# Altium PCB WatcherJet.PcbDoc (part 3 of 3)
Units mm, origin at the board's own origin, x right, y up, seen from the top; angles counter-clockwise.
Board outline 160 x 115 mm, 2 copper layers (Top Layer, Bottom Layer); 119 components, 123 nets, 459 pads, 208 vias.
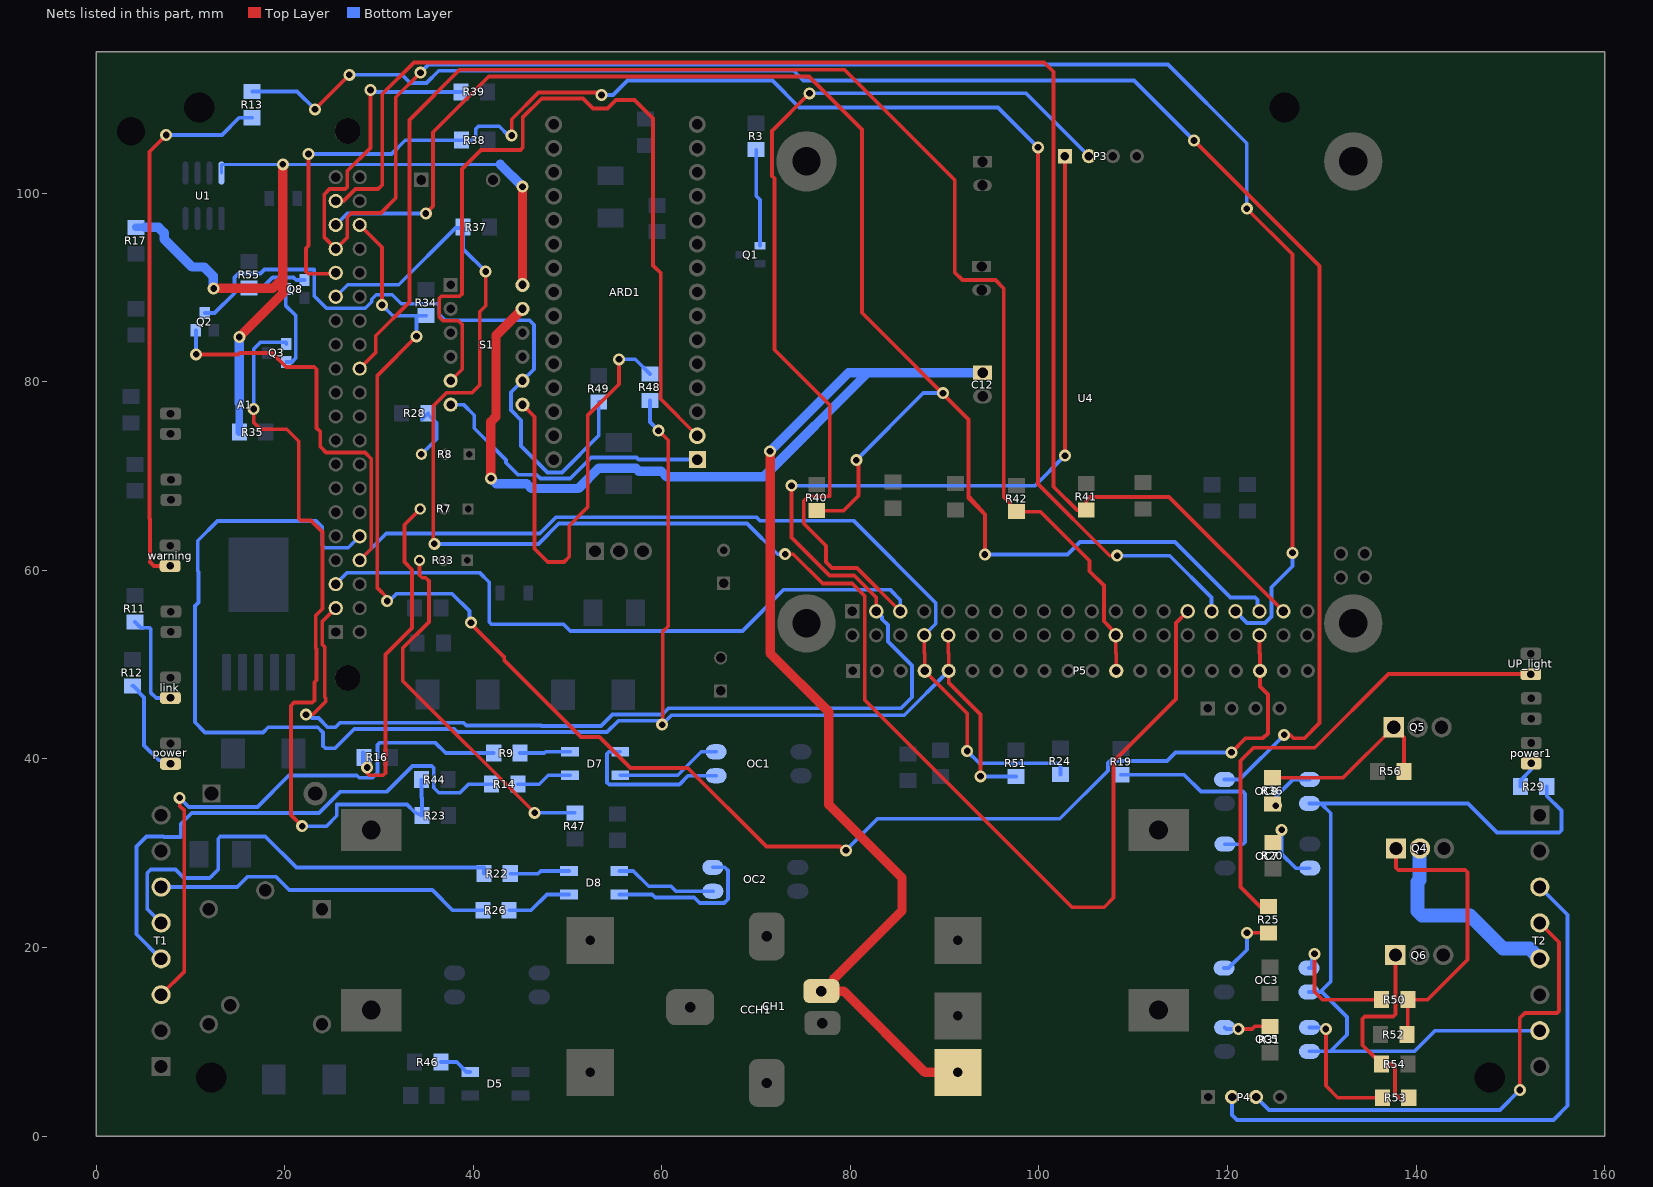
[diagram p3: the nets of this part, all layers, seen from the top]

## Via types
v1: diameter 1.27, hole 0.711, Top Layer to Bottom Layer, 200 vias
v2: diameter 1.2, hole 0.7, Top Layer to Bottom Layer, 8 vias

## Nets (pads, with @x,y where several pads share a name; then routed paths per layer and width w, separated by ;. In a path a pad name is that pad's centre, name@x,y a point inside that pad or via, vN(x,y) a via of type N, cw(c..) or ccw(c..) an arc to the next point about the centre after c; other vN are vias at no path point) (continued)
NetD5_4: D5.4 R46.1 | length 3.5
  Bottom Layer w0.4: R46.1@36.574,7.841 38.232,7.841 39.265,6.808 D5.4@39.678,6.808
NetD7_1: D7.1 OC1.1 | length 16.6
  Bottom Layer w0.4: D7.1@55.572,40.768 54.383,40.768 54.178,40.564 54.178,37.516 54.407,37.287 61.849,37.287 62.784,38.222 OC1.1@65.75,38.222
NetD7_2: D7.2 R9.1 | length 5.4
  Bottom Layer w0.4: R9.1@44.957,40.62 47.523,40.62 47.672,40.768 D7.2@50.247,40.768
NetD7_3: D7.3 OC1.2 | length 11.2
  Bottom Layer w0.4: D7.3@55.572,38.268 61.682,38.268 64.176,40.762 OC1.2@65.75,40.762
NetD7_4: D7.4 R14.1 | length 5.9
  Bottom Layer w0.4: R14.1@44.726,37.322 46.99,37.322 47.937,38.268 D7.4@50.247,38.268
NetD8_1: D8.1 OC2.1 | length 10.8
  Bottom Layer w0.4: D8.1@55.463,28.129 56.964,28.129 58.601,26.493 60.971,26.493 61.496,25.968 OC2.1@65.406,25.968
NetD8_2: D8.2 R22.1 | length 6.3
  Bottom Layer w0.4: R22.1@43.916,27.831 46.863,27.831 47.161,28.129 D8.2@50.138,28.129
NetD8_3: D8.3 OC2.2 | length 16.9
  Bottom Layer w0.4: D8.3@55.463,25.629 58.953,25.629 59.284,25.298 63.424,25.298 64.008,24.714 66.599,24.714 67.005,25.121 67.005,28.178 66.675,28.508 OC2.2@65.406,28.508
NetD8_4: D8.4 R26.1 | length 7
  Bottom Layer w0.4: R26.1@43.8,23.954 46.126,23.954 47.802,25.629 D8.4@50.138,25.629
Netlink_1: link.1 R11.1 | length 11.1
  Bottom Layer w0.4: R11.1@4.089,54.531 4.689,53.931 5.624,53.931 5.766,53.789 5.766,47.066 6.352,46.48 link.1@7.869,46.48
NetOC3_2: OC3.2 R25.1 | length 7.3
  Top Layer w0.4: v1(122.059,21.56) R25.1@124.366,21.56
  Bottom Layer w0.4: OC3.2@119.638,17.818 120.117,17.818 122.059,19.761 v1(122.059,21.56)
NetOC3_3: OC3.3 R50.2 | length 13.4
  Top Layer w0.4: v1(129.235,19.329) 129.235,15.302 130.073,14.464 R50.2@136.328,14.464
  Bottom Layer w0.4: OC3.3@128.638,17.818 128.956,17.818 128.956,19.05 v1(129.235,19.329)
NetOC5_2: OC5.2 R31.1 | length 5
  Top Layer w0.4: v1(121.144,11.363) 122.605,11.363 122.878,11.636 R31.1@124.496,11.636
  Bottom Layer w0.4: OC5.2@119.694,11.525 119.856,11.363 v1(121.144,11.363)
NetOC5_3: OC5.3 R53.2 | length 14.4
  Top Layer w0.4: v1(130.432,11.364) 130.432,5.329 131.699,4.062 R53.2@136.425,4.062
  Bottom Layer w0.4: OC5.3@128.694,11.525 130.27,11.525 v1(130.432,11.364)
NetOC7_2: OC7.2 R19.1 | length 21.3
  Bottom Layer w0.4: R19.1@108.702,38.328 115.393,38.328 117.17,36.551 121.625,36.551 121.859,36.316 121.859,31.193 121.625,30.958 OC7.2@119.732,30.958
NetOC7_4: OC7.4 R20.2 | length 7.9
  Top Layer w0.4: R20.2@124.804,31.153 125.737,32.086 v1(125.737,32.488)
  Bottom Layer w0.4: v1(125.737,32.488) 125.737,29.91 127.229,28.418 OC7.4@128.732,28.418
NetOC8_2: OC8.2 R13.2 | length 186.3
  Top Layer w0.4: v1(23.19,108.915) v1(26.848,112.573) ; v1(116.434,105.613) 129.769,92.278 129.769,43.815 128.152,42.198 126.984,42.198 126.622,42.559 v1(126.012,42.559)
  Bottom Layer w0.4: R13.2@16.538,110.816 21.289,110.816 v1(23.19,108.915) ; v1(26.848,112.573) 32.439,112.573 33.3,111.712 35.039,111.712 36.332,113.005 73.99,113.005 75.032,111.963 110.084,111.963 v1(116.434,105.613) ; OC8.2@119.685,37.825 121.277,37.825 v1(126.012,42.559)
NetOC8_3: OC8.3 R36.2 | length 5.7
  Top Layer w0.4: R36.2@124.773,35.206 124.968,35.206 v1(125.125,35.049)
  Bottom Layer w0.4: v1(125.125,35.049) 125.125,36.004 126.946,37.825 OC8.3@128.685,37.825
Netpower1_1: power1.1 R29.1 | length 2.9
  Bottom Layer w0.4: R29.1@151.063,37.072 151.063,37.719 152.212,38.868 power1.1@152.212,39.536
Netpower_1: power.1 R12.1 | length 10.5
  Bottom Layer w0.4: R12.1@3.835,47.756 3.935,47.756 4.535,47.156 4.535,47.056 5.063,46.527 5.063,41.428 6.636,39.855 7.502,39.855 power.1@7.873,39.484
NetQ1_1: Q1.1 R3.1 | length 10.4
  Bottom Layer w0.4: R3.1@70.004,104.633 70.004,99.713 70.404,99.314 Q1.1@70.404,94.443
NetQ3_1: Q3.1 R23.1 R44.2 | length 81.5
  Top Layer w0.4: v1(16.698,77.114) 16.698,75.684 17.407,74.976 20.207,74.976 21.48,73.703 21.48,65.521 21.714,65.286 22.765,65.286 23.289,64.762 23.301,64.762 23.989,64.074 23.989,55.931 23.282,55.224 23.282,51.777 23.371,51.689 23.371,48.367 23.147,48.144 23.147,46.213 22.912,45.979 20.982,45.979 20.65,45.647 20.65,34.061 v1(21.844,32.868)
  Bottom Layer w0.4: v1(16.698,77.114) 16.698,83.473 17.426,84.201 20.139,84.201 Q3.1@20.139,84.022 ; v1(21.844,32.868) 24.409,32.868 25.51,33.968 25.51,35.17 32.953,35.17 33.721,34.402 R23.1@34.561,33.995 34.561,35.865 34.507,35.918 R44.2@34.507,37.799
NetQ3_2: Q3.2 Q8.3 | length 9
  Bottom Layer w0.4: Q8.3@20.086,89.854 20.086,88.118 21.158,87.046 21.158,82.529 20.752,82.122 Q3.2@20.139,82.122
NetQ4_1: Q4.1 R50.1 R52.1 | length 30.9
  Top Layer w0.4: Q4.1@137.876,30.504 137.876,28.459 138.11,28.225 145.222,28.225 145.456,27.991 145.456,18.71 141.21,14.464 R50.1@139.128,14.464 139.128,10.858 R52.1@139.032,10.762
NetQ5_1: Q5.1 R36.1 R56.1 | length 20.2
  Top Layer w0.4: R36.1@124.773,38.006 132.263,38.006 Q5.1@137.625,43.369 138.73,42.265 R56.1@138.73,38.689
NetQ6_1: Q6.1 R53.1 R54.1 | length 21.6
  Top Layer w0.4: Q6.1@137.805,19.195 137.805,12.915 137.571,12.681 134.565,12.681 134.33,12.447 134.33,9.641 135.635,8.337 135.735,8.337 136.335,7.737 R54.1@136.335,7.637 137.389,7.637 137.77,7.256 137.77,4.494 138.201,4.062 R53.1@139.225,4.062
NetQ8_1: Q8.1 R55.1 | length 6.5
  Bottom Layer w0.4: R55.1@16.199,89.955 17.577,89.955 18.706,91.084 20.93,91.084 21.21,90.804 Q8.1@22.086,90.804
NetR7_3: R7.3 R16.2 | length 34.7
  Top Layer w0.4: v1(28.727,39.091) 28.727,38.513 28.962,38.278 30.449,38.278 30.683,38.513 30.683,51.079 33.487,53.883 33.487,60.08 32.68,60.887 32.68,64.844 R7.3@34.357,66.521
  Bottom Layer w0.4: R16.2@28.29,40.707 28.29,39.528 v1(28.727,39.091)
NetR8_3: R8.3 R28.2 | length 6.3
  Bottom Layer w0.4: R8.3@34.486,72.324 36.114,73.951 36.114,75.644 35.183,76.575 R28.2@35.183,76.675 R28.2@34.583,76.075
NetR13_1: R13.1 warning.1 | length 58.2
  Top Layer w0.4: v1(7.419,106.195) 5.645,104.421 5.645,65.513 5.702,65.456 5.702,60.892 6.112,60.482 warning.1@7.822,60.482
  Bottom Layer w0.4: v1(7.419,106.195) 13.332,106.195 15.154,108.016 R13.1@16.538,108.016
NetR25_2: R25.2 UP_light.1 | length 51.8
  Top Layer w0.4: R25.2@124.366,24.36 123.444,24.36 121.387,26.417 121.387,39.817 122.758,41.188 129.25,41.188 137.063,49.001 UP_light.1@152.178,49.001
NetR33_3: R33.3 R47.2 | length 38.6
  Top Layer w0.4: R33.3@34.285,61.066 34.285,59.516 34.586,59.215 34.951,59.215 35.294,58.872 35.294,54.544 32.515,51.765 32.515,48.282 v1(46.508,34.289)
  Bottom Layer w0.4: v1(46.508,34.289) R47.2@50.761,34.289
NG_signal_5: R22.2 T1.5 | length 47.9
  Bottom Layer w0.4: T1.5@6.873,22.606 5.406,24.073 5.406,27.889 5.786,28.268 8.402,28.268 9.303,27.368 12.04,27.368 12.275,27.602 12.275,27.619 12.937,28.281 12.937,31.539 13.171,31.773 17.925,31.773 21.225,28.473 41.116,28.473 R22.2@41.116,27.831
NG_signal_6: R26.2 T1.6 | length 36.1
  Bottom Layer w0.4: T1.6@6.873,26.416 14.951,26.416 16.044,27.508 19.065,27.508 20.474,26.099 35.649,26.099 37.793,23.954 R26.2@41,23.954
OK_signal_3: R9.2 T1.3 | length 61
  Top Layer w0.4: T1.3@6.873,14.986 9.341,17.454 9.341,34.525 8.851,35.015 v1(8.851,35.883)
  Bottom Layer w0.4: v1(8.851,35.883) 9.814,34.919 17.088,34.919 20.422,38.252 27.638,38.252 27.889,38.002 29.289,38.002 29.82,38.532 29.82,41.475 30.054,41.709 35.99,41.709 37.078,40.62 R9.2@42.157,40.62
OK_signal_4: R14.2 T1.4 | length 57.8
  Bottom Layer w0.4: T1.4@6.873,18.796 4.259,21.41 4.259,30.713 5.324,31.778 7.11,31.778 7.179,31.709 8.966,31.709 8.966,33.101 10.129,34.265 23.637,34.265 25.907,36.535 30.834,36.535 33.542,39.243 35.585,39.243 35.789,39.04 35.789,36.957 36.322,36.424 38.583,36.424 39.481,37.322 R14.2@41.926,37.322
PPS: OC3.4 OC5.4 OC8.4 R29.2 T2.7 | length 89.1
  Bottom Layer w0.4: OC3.4@128.638,15.278 130.019,15.278 132.665,12.632 132.665,10.749 130.902,8.985 ; OC8.4@128.685,35.285 129.917,35.285 ; OC5.4@128.694,8.985 130.902,8.985 ; 129.832,15.278 130.95,16.396 130.95,34.252 129.917,35.285 ; T2.7@153.126,11.179 141.995,11.179 139.802,8.985 130.902,8.985 ; R29.2@153.863,37.072 153.863,36.078 155.415,34.526 155.415,32.438 155.181,32.203 148.594,32.203 145.513,35.285 129.917,35.285
RASp_A0: A1.29 R37.1 U4.29 | length 185.4
  Top Layer w0.4: v1(35.859,62.818) 35.748,62.928 35.748,77.445 37.145,78.842 39.853,78.842 40.668,79.657 40.668,87.44 41.303,88.075 v1(41.303,91.717) ; v1(73.079,61.726) 73.932,61.726 77.058,58.6 80.201,58.6 81.509,57.292 81.509,46.253 103.49,24.272 106.918,24.272 107.917,25.271 107.917,39.743 114.539,46.365 114.539,54.432 U4.29@115.768,55.662
  Bottom Layer w0.4: A1.29@25.4,89.027 26.67,90.297 32.08,90.297 38.1,96.317 R37.1@38.913,96.317 ; v1(35.859,62.818) 46.895,62.818 49.059,64.981 69.023,64.981 72.279,61.726 v1(73.079,61.726) ; R37.1@38.913,96.415 R37.1@38.913,96.317 ; v1(41.303,91.717) 38.913,94.107 R37.1@38.913,96.317
RASp_A1: A1.31 R38.1 U4.31 | length 162.5
  Top Layer w0.4: v1(22.518,104.184) 22.518,94.449 22.247,94.178 22.247,91.715 22.481,91.481 25.314,91.481 A1.31@25.4,91.567 ; v1(44.064,106.137) 44.064,107.866 46.91,110.712 53.33,110.712 v1(53.602,110.441) ; v1(99.898,104.877) 99.898,69.177 107.513,61.562 v1(108.294,61.562)
  Bottom Layer w0.4: v1(22.518,104.184) 31.312,104.184 32.768,105.64 R38.1@38.722,105.64 39.853,105.64 40.259,106.047 40.259,106.832 40.542,107.115 42.745,107.115 43.723,106.137 v1(44.064,106.137) ; v1(53.602,110.441) 54.815,110.441 56.338,111.964 71.732,111.964 74.574,109.122 95.653,109.122 v1(99.898,104.877) ; v1(108.294,61.562) 113.874,61.562 118.308,57.128 U4.31@118.308,55.662
RASp_A2: A1.33 R39.1 U4.33 | length 203.5
  Top Layer w0.4: v1(29.083,110.973) 29.083,104.826 26.619,102.362 26.619,100.686 26.391,100.457 24.751,100.457 24.192,99.898 24.192,95.315 A1.33@25.4,94.107 26.619,95.326 26.619,97.46 27.076,97.917 30.201,97.917 31.775,99.492 31.775,110.185 v1(34.392,112.801) ; v1(122.047,98.374) 126.888,93.533 v1(126.888,61.861)
  Bottom Layer w0.4: v1(29.083,110.973) 29.3,110.755 R39.1@38.696,110.755 ; v1(34.392,112.801) 35.255,113.665 113.69,113.665 122.047,105.308 v1(122.047,98.374) ; U4.33@120.848,55.662 122.078,54.432 123.977,54.432 124.663,55.118 124.663,58.217 126.888,60.442 v1(126.888,61.861)
RASp_A3: A1.35 R40.1 U4.35 | length 176.8
  Top Layer w0.4: v1(34.95,97.866) 35.712,98.628 35.712,106.477 41.631,112.395 75.616,112.395 81.229,106.782 81.229,87.325 92.532,76.022 92.532,67.92 ; R40.1@76.427,66.336 79.265,66.336 80.848,67.92 80.848,71.478 v1(80.625,71.701) ; v1(94.259,61.697) 94.259,65.938 ; 92.532,67.92 92.532,67.666 94.259,65.938 ; 92.532,67.92 94.259,65.938
  Bottom Layer w0.4: A1.35@25.4,96.647 26.619,97.866 v1(34.95,97.866) ; v1(80.625,71.701) 87.731,78.808 v1(89.819,78.808) ; v1(94.259,61.697) 103.031,61.697 104.336,63.002 114.416,63.002 120.3,57.118 122.939,57.118 123.173,56.883 123.173,55.877 U4.35@123.388,55.662
RASp_A4: A1.37 R41.1 U4.37 | length 163.9
  Top Layer w0.4: A1.37@25.4,99.187 26.232,99.187 27.502,100.457 29.896,100.457 30.328,100.889 30.328,110.533 33.688,113.894 100.559,113.894 101.549,112.903 101.549,68.885 104.028,66.406 R41.1@105.012,66.406 105.012,67.386 105.418,67.793 113.798,67.793 U4.37@125.928,55.662
RASp_A5: A1.36 P5.18 R34.1 U4.36 | length 169.3
  Top Layer w0.4: A1.36@27.94,96.647 30.302,94.285 v1(30.302,88.163) ; v1(30.861,56.754) 30.861,57.099 29.813,58.147 29.813,80.689 v1(33.96,84.836) ; v1(39.745,54.459) 39.745,54.334 43.265,50.814 43.265,50.497 51.418,42.345 53.365,42.345 56.67,39.04 62.746,39.04 71.081,30.705 78.896,30.705 79.286,30.315 v1(79.522,30.315) ; v1(120.418,40.7) 121.927,42.209 123.776,42.209 124.283,42.716 124.283,46.847 123.446,47.684 123.446,49.337 P5.18@123.436,49.346 123.436,51.206 123.388,51.254 U4.36@123.388,53.122
  Bottom Layer w0.4: v1(30.302,88.163) 31.444,87.022 33.96,87.022 ; v1(30.861,56.754) 31.077,56.754 31.842,57.519 37.744,57.519 39.579,55.684 39.579,54.625 v1(39.745,54.459) ; v1(33.96,84.836) 33.96,87.022 ; R34.1@34.999,87.022 33.96,87.022 ; v1(79.522,30.315) 82.861,33.655 102.21,33.655 107.315,38.76 107.315,39.567 107.523,39.774 113.566,39.774 114.491,40.7 v1(120.418,40.7)
RASp_D11: A1.24 P5.12 R42.1 U4.24 | length 156.2
  Top Layer w0.4: A1.24@27.94,81.407 29.641,83.108 29.641,84.897 33.223,88.479 33.223,107.798 38.532,113.106 79.375,113.106 91.059,101.422 91.059,91.618 91.872,90.805 95.377,90.805 96.271,89.911 96.271,67.767 R42.1@97.809,66.23 ; R42.1@97.625,66.23 R42.1@97.809,66.23 ; P5.12@108.196,49.346 108.196,51.206 108.148,51.254 U4.24@108.148,53.122 107.532,53.957 106.883,54.606 106.883,58.403 105.364,59.922 105.364,61.027 100.162,66.23 R42.1@97.809,66.23
RS485_A: P4.2 T2.3 | length 62.8
  Bottom Layer w0.4: P4.2@120.481,4.142 120.481,2.246 121.015,1.712 154.565,1.712 156.072,3.219 156.072,23.472 T2.3@153.126,26.419
RS485_B: P4.3 T2.4 | length 51.7
  Top Layer w0.4: v1(151.003,4.877) 151.003,12.506 151.544,13.047 154.942,13.047 155.176,13.281 155.176,20.558 T2.4@153.126,22.609
  Bottom Layer w0.4: P4.3@123.021,4.142 124.394,2.769 148.895,2.769 v1(151.003,4.877)
Rx_HV: ARD1.2 S1.5 | length 89.5
  Top Layer w0.4: S1.5@37.592,80.126 38.811,81.345 38.811,86.081 38.405,86.487 36.779,86.487 36.373,86.893 36.373,88.849 36.601,89.078 38.542,89.078 38.796,89.332 38.796,102.6 40.807,104.611 44.993,104.611 45.227,104.845 45.227,108.04 47.245,110.058 51.64,110.058 52.694,109.004 54.22,109.004 55.118,109.902 57.088,109.902 59.058,107.932 59.058,92.358 59.868,91.548 59.868,78.181 ARD1.2@63.754,74.295
Rx_LV: A1.10 P5.5 R48.1 R51.2 U4.10 | length 182.6
  Top Layer w0.4: v1(59.645,74.824) 60.663,73.806 60.663,54.071 60.078,53.486 60.078,43.695 v1(60.02,43.637) ; U4.10@90.368,53.122 90.368,51.254 90.416,51.206 P5.5@90.416,49.346 90.416,48.111 93.802,44.725 v1(93.802,38.154)
  Bottom Layer w0.4: A1.10@27.94,63.627 26.721,62.408 24.198,62.408 23.964,62.642 23.964,64.604 23.321,65.248 12.862,65.248 10.771,63.156 10.771,59.912 10.834,59.849 10.834,56.605 10.458,56.229 10.458,43.886 11.529,42.816 17.691,42.816 18.242,43.367 23.501,43.367 24.048,42.82 24.048,41.383 24.282,41.149 25.346,41.149 27.364,43.167 37.943,43.167 38.254,42.856 54.186,42.856 55.393,44.063 60.02,44.063 v1@60.446,44.063 ; R48.1@58.726,78.039 58.726,75.743 v1(59.645,74.824) ; v1(60.02,43.637) v1@60.446,44.063 ; P5.5@90.416,49.346 85.7,44.63 61.013,44.63 v1@60.446,44.063 ; v1(93.802,38.154) R51.2@97.56,38.154
SCL: A1.5 P3.2 U4.5 | length 168.7
  Top Layer w0.4: v1(75.667,110.617) 71.679,106.629 71.679,101.854 71.933,101.6 71.933,83.414 77.8,77.546 77.8,67.869 75.54,67.869 75.057,67.386 75.057,64.948 77.394,62.611 77.394,60.884 78.029,60.249 80.701,60.249 U4.5@85.288,55.662
  Bottom Layer w0.4: A1.5@25.4,58.547 26.619,59.766 40.665,59.766 41.687,58.744 41.687,54.524 41.921,54.29 49.571,54.29 50.276,53.585 68.546,53.585 72.923,57.963 84.187,57.963 85.288,56.862 U4.5@85.288,55.662 ; v1(75.667,110.617) 98.623,110.617 P3.2@105.298,103.943
SDA: A1.3 P3.1 U4.3 | length 170.4
  Top Layer w0.4: 22.977,44.746 24.341,46.109 24.341,46.441 24.233,46.548 24.233,51.879 23.978,52.135 23.978,54.585 A1.3@25.4,56.007 ; v1(73.736,68.986) 73.736,63.478 77.765,59.449 80.403,59.449 82.748,57.104 U4.3@82.748,55.662 ; v1(102.758,72.176) P3.1@102.758,103.943
  Bottom Layer w0.4: v1(22.249,44.703) 22.484,44.703 22.851,44.336 23.572,44.336 24.536,43.372 25.372,43.372 25.837,43.837 38.945,43.837 39.246,43.537 47.207,43.537 47.234,43.51 53.532,43.51 54.748,44.726 60.025,44.726 60.687,45.388 85.377,45.388 86.54,46.552 86.54,49.911 83.978,52.473 83.978,54.201 83.36,54.819 83.36,55.05 U4.3@82.748,55.662 ; v1(73.736,68.986) 99.568,68.986 v1(102.758,72.176)
SW7: R48.2 S1.7 | length 47.4
  Top Layer w0.4: S1.7@45.212,77.586 46.49,76.308 46.49,62.291 47.898,60.884 49.606,60.884 50.167,61.444 50.167,64.749 52.121,66.704 52.121,76.429 55.451,79.759 v1(55.451,82.399)
  Bottom Layer w0.4: v1(55.451,82.399) 57.165,82.399 R48.2@58.726,80.839
SW9: Q2.3 R49.1 S1.8 | length 72.8
  Bottom Layer w0.4: Q2.3@11.515,87.299 12.546,87.299 14.656,89.408 14.656,91.084 15.062,91.491 17.424,91.491 17.856,91.923 23.114,91.923 23.114,89.103 24.409,87.808 28.524,87.808 29.213,88.497 29.213,88.773 29.693,89.252 31.391,89.252 32.353,88.29 36.373,88.29 36.373,87.177 37.008,86.542 45.945,86.542 46.431,86.055 46.431,81.345 S1.8@45.212,80.126 43.993,78.907 43.993,77.008 45.062,75.94 45.062,73.201 47.863,70.399 49.394,70.399 53.301,74.307 R49.1@53.301,77.855
SW11: C12.P CCH1.1 CH1.2 S1.11 | length 176
  Top Layer w1: v1(41.859,69.774) 41.859,75.772 42.4,76.313 42.4,84.934 S1.11@45.212,87.746 ; v1(71.476,72.644) 71.476,51.223 77.71,44.989 77.71,35.146 85.466,27.39 85.466,23.909 78.241,16.683 78.241,16.139 CCH1.1@77.481,15.379 ; CCH1.1@76.919,15.379 CCH1.1@77.481,15.379 ; CH1.2@91.397,6.752 87.913,6.752 79.286,15.379 CCH1.1@77.481,15.379
  Bottom Layer w1: v1(41.859,69.774) 42.436,69.197 45.66,69.197 46.163,68.695 51.146,68.695 53.289,70.837 57.255,70.837 57.564,70.528 59.927,70.528 60.536,69.918 70.782,69.918 81.826,80.963 ; v1(71.476,72.644) 79.794,80.963 81.826,80.963 ; C12.P@94.019,80.963 81.826,80.963
SW12: R17.2 R35.2 S1.12 U1.8 | length 94.4
  Top Layer w1: v1(12.446,89.916) 18.72,89.916 19.787,90.983 ; v1(15.173,84.76) 19.787,89.373 19.787,90.983 ; v1(19.787,103.073) 19.787,90.983 ; S1.12@45.212,90.286 v1(45.212,100.711)
  Bottom Layer w0.311: U1.8@13.273,102.158 13.273,103.073 v1(19.787,103.073) 42.85,103.073
  Bottom Layer w0.8: R17.2@4.211,96.394 5.158,96.394 ; R35.2@15.173,74.678 15.183,74.678 15.183,77.718
  Bottom Layer w1: 5.158,96.394 6.608,96.394 7.194,95.808 7.194,95.153 10.16,92.187 11.438,92.187 12.394,91.23 12.394,89.968 v1(12.446,89.916) ; v1(15.173,84.76) 15.173,77.727 15.183,77.718 ; 42.85,103.073 v1(45.212,100.711)
Tx_HV: ARD1.1 S1.6 | length 31.4
  Bottom Layer w0.4: S1.6@37.592,77.586 38.967,77.586 40.098,76.455 40.098,75.08 43.458,71.72 43.458,71.423 44.729,70.151 46.711,70.151 47.117,69.745 50.283,69.745 52.506,71.968 57.318,71.968 57.531,71.755 ARD1.1@63.754,71.755
Tx_LV: A1.8 P5.4 Q2.2 R24.1 U4.8 | length 138
  Top Layer w0.4: v1(10.6,82.917) 15.065,82.917 15.221,83.072 18.639,83.072 20.142,81.569 23.117,81.569 23.352,81.335 23.352,75.122 23.749,74.724 23.749,73.144 24.376,72.517 28.499,72.517 29.159,71.857 29.159,62.306 A1.8@27.94,61.087 ; U4.8@87.828,53.122 87.828,51.254 87.876,51.206 P5.4@87.876,49.346 92.38,44.842 v1(92.38,40.843)
  Bottom Layer w0.4: Q2.2@10.565,85.478 10.582,85.46 10.582,82.935 v1(10.6,82.917) ; A1.8@27.94,61.087 30.762,63.909 47.039,63.909 48.765,65.635 70.031,65.635 70.385,65.281 80.332,65.281 89.052,56.561 89.052,54.346 U4.8@87.828,53.122 ; v1(92.38,40.843) 93.675,39.548 102.069,39.548 102.272,39.345 R24.1@102.272,38.364
U: Q4.2 T2.5 | length 21.8
  Bottom Layer w1.5: Q4.2@140.416,30.504 140.354,30.442 140.354,27.179 140.134,26.959 140.134,23.872 140.614,23.392 145.71,23.392 149.221,19.88 152.044,19.88 T2.5@153.126,18.799
pads on no net: A1. A1.17 A1.27 A1.38 A1.40 ARD1.3 ARD1.18 ARD1.28 K2.NO P5.19 P5.20 U4.17 U4.27 U4.38 U4.40 U4.41 U4.42 U4.43 U4.44 U4.S1 U4.S2 U4.S3 U4.S4

## Polygon pours and split planes (outlines as drawn)
GND1 on Top Layer "NONET_L-01_P-001" (solid, shelved, pour order 133): 159.891,52.805 159.891,0.195 159.69,-0.006 125.306,-0.006 125.306,35.824 125.125,36.004 138.655,49.534 138.655,52.834
GND on Top Layer "NONET_L-01_P-001" (solid, shelved, pour order 130): 137.967,52.853 137.967,51.201 124.371,37.604 124.371,0 0.025,0 0.012,-0.012 0,0 0,114.999 137.04,114.999 137.315,114.723
GND on Top Layer "NONET_L-01_P-001" (solid, shelved, pour order 128): 137.266,114.884 137.315,114.835 137.315,50.549 123.293,36.527 123.293,0.022 0.181,0.022 0.14,0.062 0.14,114.86 0.012,114.988
GND on Top Layer "NONET_L-01_P-001" (solid, shelved, pour order 125): 137.641,53.179 137.315,53.505 137.315,115.163 0.187,115.163 0.012,114.988 0.012,-0.012 0.039,-0.039 0.14,0.062 125.834,0.062 125.834,40.964 125.631,41.168
GND on Top Layer "NONET_L-01_P-001" (solid, remove dead copper, shelved, pour order 119): 127.104,-0.012 0.012,-0.012 0,0 0.012,0.012 0.012,114.988 137.162,114.988 137.315,114.835 137.315,53.505 137.641,53.179 127.131,42.669 127.131,-0.039
GND on Top Layer "NONET_L-01_P-001" (solid, remove dead copper, shelved, pour order 114): 137.641,53.179 127.157,42.695 127.157,-0.065 127.104,-0.012 0.012,-0.012 0.012,114.988 0,115 0.163,115.163 137.315,115.163 137.315,53.701 137.217,53.603
GND1 on Top Layer "NONET_L-01_P-001" (solid, remove dead copper, shelved, pour order 116): 159.92,52.777 138.044,52.777 137.967,52.853 127.5,42.386 127.5,-0.031 159.817,-0.031 159.92,0.073
GND on Top Layer "NONET_L-01_P-001" (solid, remove dead copper, shelved, pour order 104): 110.727,5.913
GND1 on Top Layer "NONET_L-01_P-001" (solid, remove dead copper, shelved, pour order 88): 137.967,52.853 136.564,52.853 124.568,40.857 124.568,0.148 159.844,0.148 159.996,-0.003 159.996,52.881
GND1 on Top Layer "NONET_L-01_P-001" (solid, remove dead copper, shelved, pour order 84): 159.996,52.853 137.967,52.853 137.967,52.236 125.306,39.574 125.306,-0.006 159.992,-0.006
GND on Top Layer "NONET_L-01_P-001" (solid, remove dead copper, shelved, pour order 77): 137.731,52.651 137.099,53.283 137.099,53.505 137.099,114.133 0.708,114.133 0,113.425 0,0 124.371,0 124.395,-0.025 124.741,0.321 124.741,41.629
GND on Top Layer "NONET_L01_P024" (solid, remove dead copper, shelved, pour order 24): 0.381,2.032
GND1 on Top Layer "NONET_L-01_P-001" (solid, remove dead copper, shelved, pour order 74): 159.996,52.853 137.967,52.853 125.295,40.181 124.568,40.181 124.568,-0.134 124.635,-0.201 124.836,0 159.999,0
GND1 on Bottom Layer "NONET_L-01_P-001" (solid, shelved, pour order 132): 159.92,52.777 159.863,52.834 138.655,52.834 138.655,50.015 125.088,36.447 125.306,36.23 125.306,-0.006 159.992,-0.006 160.021,0.022 160.021,44.298
GND on Bottom Layer "NONET_L-01_P-001" (solid, shelved, pour order 131): 138.006,52.815 137.967,52.777 137.967,50.101 124.395,36.529 124.395,-0.025 0.058,-0.025 0,0.033 0,114.999 137.151,114.999 137.315,114.835
GND on Bottom Layer "NONET_L-01_P-001" (solid, shelved, pour order 129): 137.315,50.549 123.293,36.527 123.293,0.022 123.259,-0.012 0.012,-0.012 0.012,114.732 0.443,115.163 137.315,115.163 137.315,52.903 137.266,52.853
GND on Bottom Layer "NONET_L-01_P-001" (solid, shelved, pour order 71): 137.217,114.933 137.315,114.835 137.315,53.505 137.641,53.179 125.405,40.943 124.068,40.943 124.068,0.009 124.047,-0.011 124.036,0 0,0 0,114.999
GND on Bottom Layer "NONET_L-01_P-001" (solid, shelved, pour order 123): 137.641,53.179 125.631,41.168 125.631,0.017 0.017,0.017 0,0 0,114.999 137.151,114.999 137.315,114.835 137.315,53.505
GND on Bottom Layer "NONET_L-01_P-001" (solid, remove dead copper, shelved, pour order 118): 0.039,-0.039 0.065,-0.012 127.104,-0.012 127.104,42.642 137.641,53.179 137.315,53.505 137.315,114.835 137.162,114.988 0.012,114.988
GND on Bottom Layer "NONET_L-01_P-001" (solid, shelved, pour order 115): 137.641,53.179 127.157,42.695 127.157,-0.065 0.065,-0.065 0.012,-0.012 0.012,114.988 137.162,114.988 137.315,114.835 137.315,53.505
GND1 on Bottom Layer "NONET_L-01_P-001" (solid, remove dead copper, shelved, pour order 117): 159.868,0.021 159.817,-0.031 127.5,-0.031 127.5,42.386 137.967,52.853 159.996,52.853
GND on Bottom Layer "NONET_L02_P016" (solid, remove dead copper, shelved, pour order 16): 0.381,2.286
GND on Bottom Layer "NONET_L-01_P-001" (solid, remove dead copper, shelved, pour order 96): 137.967,52.853
GND on Bottom Layer "NONET_L-01_P-001" (solid, remove dead copper, shelved, pour order 85): 137.967,52.853
GND1 on Bottom Layer "NONET_L-01_P-001" (solid, remove dead copper, shelved, pour order 89): 159.996,52.853 136.564,52.853 124.518,40.807 124.518,-0.084 124.568,-0.134 124.774,0.073 159.92,0.073 159.92,52.777 159.929,52.786
GND1 on Bottom Layer "NONET_L-01_P-001" (solid, remove dead copper, shelved, pour order 83): 159.996,52.853 159.929,52.786 138.167,52.786 138.167,52.478 125.306,39.616 125.306,-0.006 159.992,-0.006 159.999,0
GND1 on Bottom Layer "NONET_L-01_P-001" (solid, remove dead copper, shelved, pour order 82): 144.548,32.88
GND on Bottom Layer "NONET_L-01_P-001" (solid, remove dead copper, shelved, pour order 76): 137.967,52.853 137.315,53.505 137.315,114.723 137.025,115.014 137.01,114.999 0,114.999 0,0 0.025,-0.025 124.395,-0.025 124.395,41.14 124.331,41.204
GND on Bottom Layer "NONET_L02_P036" (solid, remove dead copper, shelved, pour order 36): 4.268,114.2
GND on Bottom Layer "NONET_L-01_P-001" (solid, remove dead copper, shelved, pour order 40): 0.175,112.783
GND on Bottom Layer "NONET_L-01_P-001" (solid, remove dead copper, shelved, pour order 41): 0,115
GND on Bottom Layer "NONET_L-01_P-001" (solid, remove dead copper, shelved, pour order 49): 137.315,53.505
GND1 on Bottom Layer "NONET_L-01_P-001" (solid, remove dead copper, shelved, pour order 57): 159.996,52.853 137.967,52.853
GND on Bottom Layer "NONET_L-01_P-001" (solid, remove dead copper, shelved, pour order 70): 0,114.999 0,0 125.009,0 125.022,0.013 124.068,0.967 124.068,43.133 126.943,43.133 137.315,53.505 137.217,53.603 137.217,114.933
GND1 on Bottom Layer "NONET_L-01_P-001" (solid, remove dead copper, shelved, pour order 75): 159.996,52.853 137.967,52.853 125.295,40.181 124.568,40.181 124.568,-0.134 124.635,-0.201 124.836,0 159.999,0
GND on Bottom Layer "GND" (solid, shelved, pour order 10): 2.921,10.276 2.921,3.302 8.128,3.302 8.22,3.302 8.22,4.988 8.22,10.276

## Keep-outs
Keep-Out Layer:
  the board outline again, w1.2

## Other copper
Top Layer:
  pour cut-out: 8.844,111.1 8.844,107.258 12.632,107.258 12.74,107.366 12.74,111.1
  pour cut-out: 111.272,5.82 111.272,3.693 110.727,3.693 110.727,5.82 108.885,5.8 108.893,6.33 110.727,6.33 110.727,8.294 111.272,8.294 111.27,6.33 113.13,6.33 113.13,5.82
  pour cut-out: 30.224,8.333 30.224,7.833 27.132,7.833 27.132,8.333
  region net GND: 14.716,62.875 14.716,56.149 19.75,56.149 19.794,56.105 19.794,62.897
  pour cut-out: -2.37,59.588
  region net B: 146.95,13.787
  pour cut-out: 14.666,63.169
  region net U: 153.126,26.419
  region net U: 139.362,46.324
  pour cut-out: 145.57,8.355 145.57,4.025 150.048,4.025 150.073,4.05 150.073,8.404
  pour cut-out: 124.1,111.354 124.1,106.899 124.123,106.876 128.28,106.876 128.28,111.308 128.257,111.331
  pour cut-out: 10.242,4.482 10.242,8.183 10.314,8.255 14.278,8.255 14.278,4.482 14.326,4.434
Bottom Layer:
  region net Ejector: 139.329,40.824
  pour cut-out: 14.716,62.875 14.716,56.149 14.76,56.105 19.794,56.105 19.794,62.897 19.816,62.919
  pour cut-out: 110.283,9.451
  region net B: 139.822,20.096
  region: 153.126,22.609
  region: 143.292,23.915
  region net B: 145.504,17.824
  region: 153.126,22.609
  region net B: 143.174,16.564
  region net B: 137.062,16.958
  pour cut-out: 146.684,8.854
  pour cut-out: 145.57,8.355 145.57,4.025 150.048,4.025 150.073,4.05 150.073,8.404
  pour cut-out: 12.74,111.1 12.74,107.366 12.632,107.258 8.844,107.258 8.844,111.1
  pour cut-out: 10.242,8.183 10.242,4.482 10.194,4.434 14.326,4.434 14.326,8.207 14.23,8.303
  pour cut-out: 124.1,111.354 124.1,106.944 124.077,106.922 124.123,106.876 128.28,106.876 128.28,111.308 128.234,111.354
  pour cut-out: 3.67,106.597

## Silkscreen, mask and mechanical layers (free items; w line width, h text height)
Top Overlay:
  pour cut-out: 111.291,6.536
  region: 14.127,36.714
  lines w0.01: 159.612,36.986 159.998,36.6
  lines w0.1: 151.053,38.699 151.057,38.696 ; 152.178,46.468 152.216,46.431 ; 152.212,41.695 152.216,41.698 ; 154.179,45.331 154.212,45.363 ; 159.981,50.806 160.165,50.623 ; 159.994,52.879 159.996,52.881 ; 160.024,49.3 160.032,49.292
  lines w0.2: 7.871,53.434 7.873,53.433 ; 7.871,53.527 7.873,53.526 ; 152.144,50.779 159.954,50.779
  lines w0.254: 0,2 159.998,2 ; 0,113 160.001,113
  lines w0.3: 10.922,109.093 126.051,109.093 ; 124.395,47.319 124.433,47.281 ; 128.386,46.787 114.627,46.787 114.627,2.669 128.424,2.669 128.424,46.749
Bottom Overlay:
  drawing of 174 lines, arcs and shapes, not listed
  text "D: 2025-12-21 T: 11:10:55" at 129.912,111.127 h2
  text "Arduino" at 50.787,99.148 h0.9 r90
  text "MONITAIT.COM /  WatcherJET" at 118.894,76.526 h2
  text "Sensitivity Direction" at 45.385,64.887 h1 r270
  text "GPIO5_RXD" at 130.975,46.699 h0.7
  text "GPIO12_TXD" at 119.583,46.572 h0.7
  text "RS485 module" at 117.542,40.905 h0.6 r90
  text "Ejector" at 159.582,34.333 h0.8
  text "Analog_8" at 5.469,32.798 h0.42
  text "Buzzer" at 158.809,30.906 h0.8
  text "Analog_7" at 5.338,28.719 h0.42
  text "RS485-A" at 159.208,27.869 h0.7
  text "NG_signal_6" at 5.322,26.031 h0.42
  text "RS485-B" at 159.197,23.42 h0.7
  text "NG_signal_5" at 5.326,22.193 h0.42
  text "OK_signal_4" at 5.37,18.565 h0.42
  text "U" at 156.205,17.517 h0.8
  text "OK_signal_3" at 5.262,14.816 h0.42
  text "B" at 156.548,13.711 h0.8
  text "12V_IN" at 5.349,11.57 h0.7
  text "PPS" at 157.378,9.877 h0.8
  text "GND" at 5.195,6.984 h0.7
  text "GND1" at 157.628,6.336 h0.8
  text "3.3V" at 127.5,5.019 h0.8
  text "GND" at 119.015,4.97 h0.8
  text "B" at 123.523,4.955 h0.8
  text "A" at 120.913,4.117 h0.8
Top Assembly:
  circle w0.254: c38.279,101.43 r6.858
Bottom Component Outline:
  lines w0.1: 135.535,41.529 144.915,41.619
Mechanical 13:
  lines w0.3: 159.997,61.185 159.999,61.187
Bottom Assembly:
  lines w0.1: 135.535,41.529 135.535,46.416 144.768,46.416 144.915,46.27 144.915,41.619

## Text inside footprints (layer, text, board x,y; h text height)
A1: Bottom Overlay "1" at 22.538,53.124 h1.02 r270
BACK_light: Bottom Overlay "+" at 149.168,44.526 h1 r270
Buzzer1: Bottom Overlay "+" at 6.248,52.959 h1 r90
CH1: Bottom Overlay "P-" at 87.091,11.021 h3; Bottom Overlay "P+" at 87.289,4.977 h3; Bottom Overlay "BM" at 87.289,19.245 h3; Bottom Overlay "B-" at 60.932,19.245 h3; Bottom Overlay "B+" at 60.536,5.472 h3
count_a_ok: Bottom Overlay "+" at 4.875,67.736 h1 r270
count_b_ng: Bottom Overlay "+" at 4.823,74.735 h1 r270
link: Bottom Overlay "+" at 4.821,46.734 h1 r270
LS1: Bottom Overlay "+" at 30.761,103.877 h1.52
power: Bottom Overlay "+" at 4.825,39.738 h1 r270
power1: Bottom Overlay "+" at 150.54,39.016 h1 r90
UP_light: Bottom Overlay "+" at 149.13,49.255 h1 r270
warning: Bottom Overlay "+" at 4.774,60.736 h1 r270